# Altium PCB Nano2.PcbDoc
Units mm, origin at the board's own origin, x right, y up, seen from the top; angles counter-clockwise.
Board outline 26 x 54 mm, 4 copper layers (Top Layer, Plane 1, Plane 2, Bottom Layer), stack 1.58 mm thick; 59 components, 34 nets, 219 pads, 123 vias.
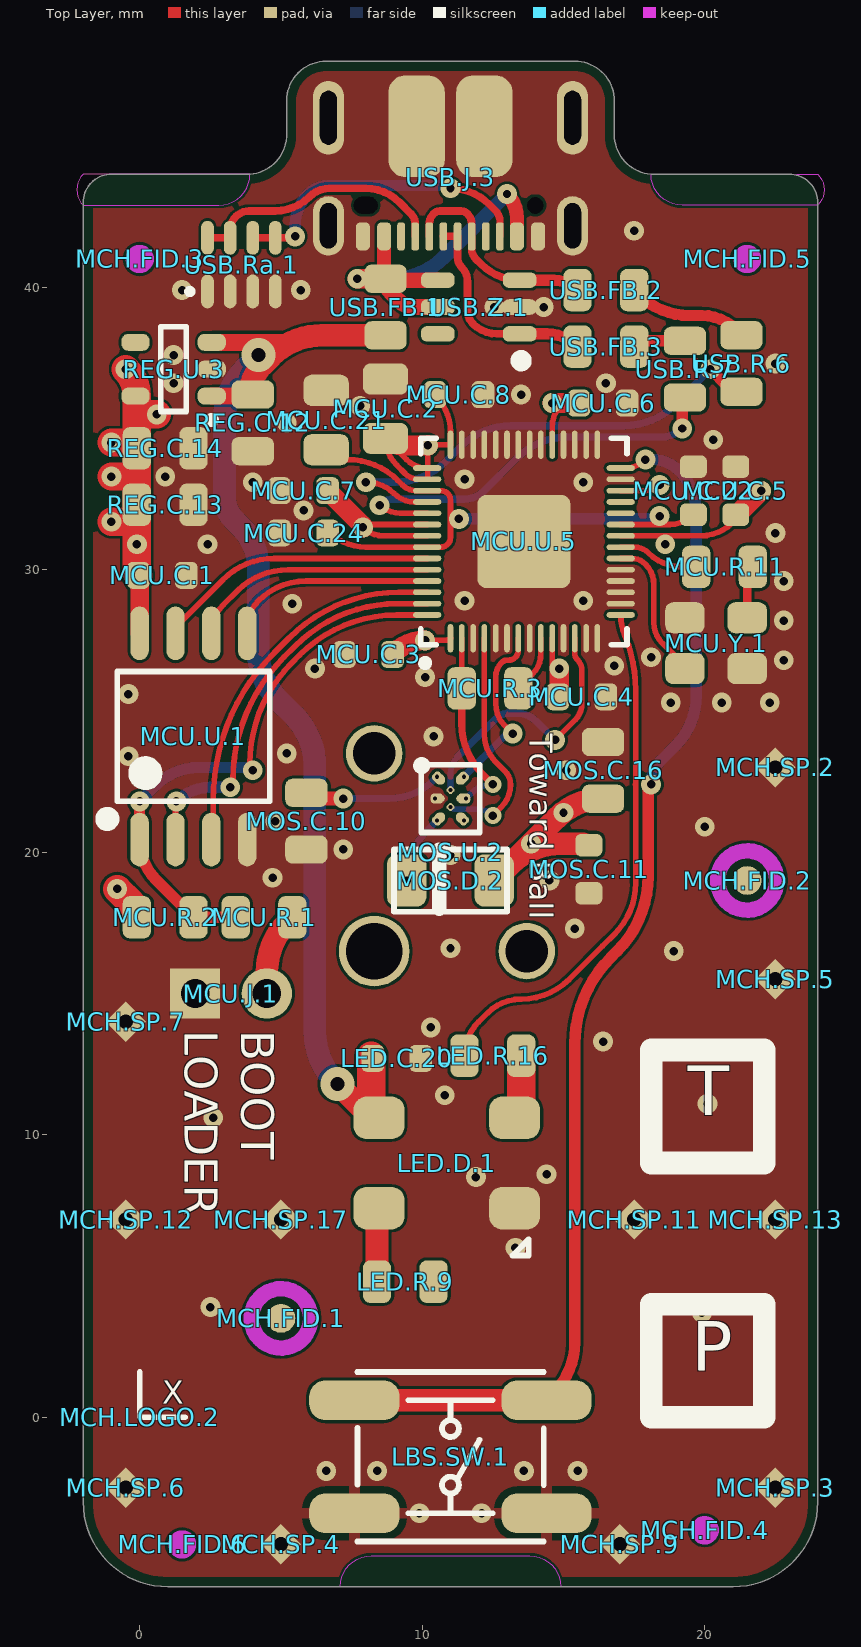
[diagram p0: Top Layer view]
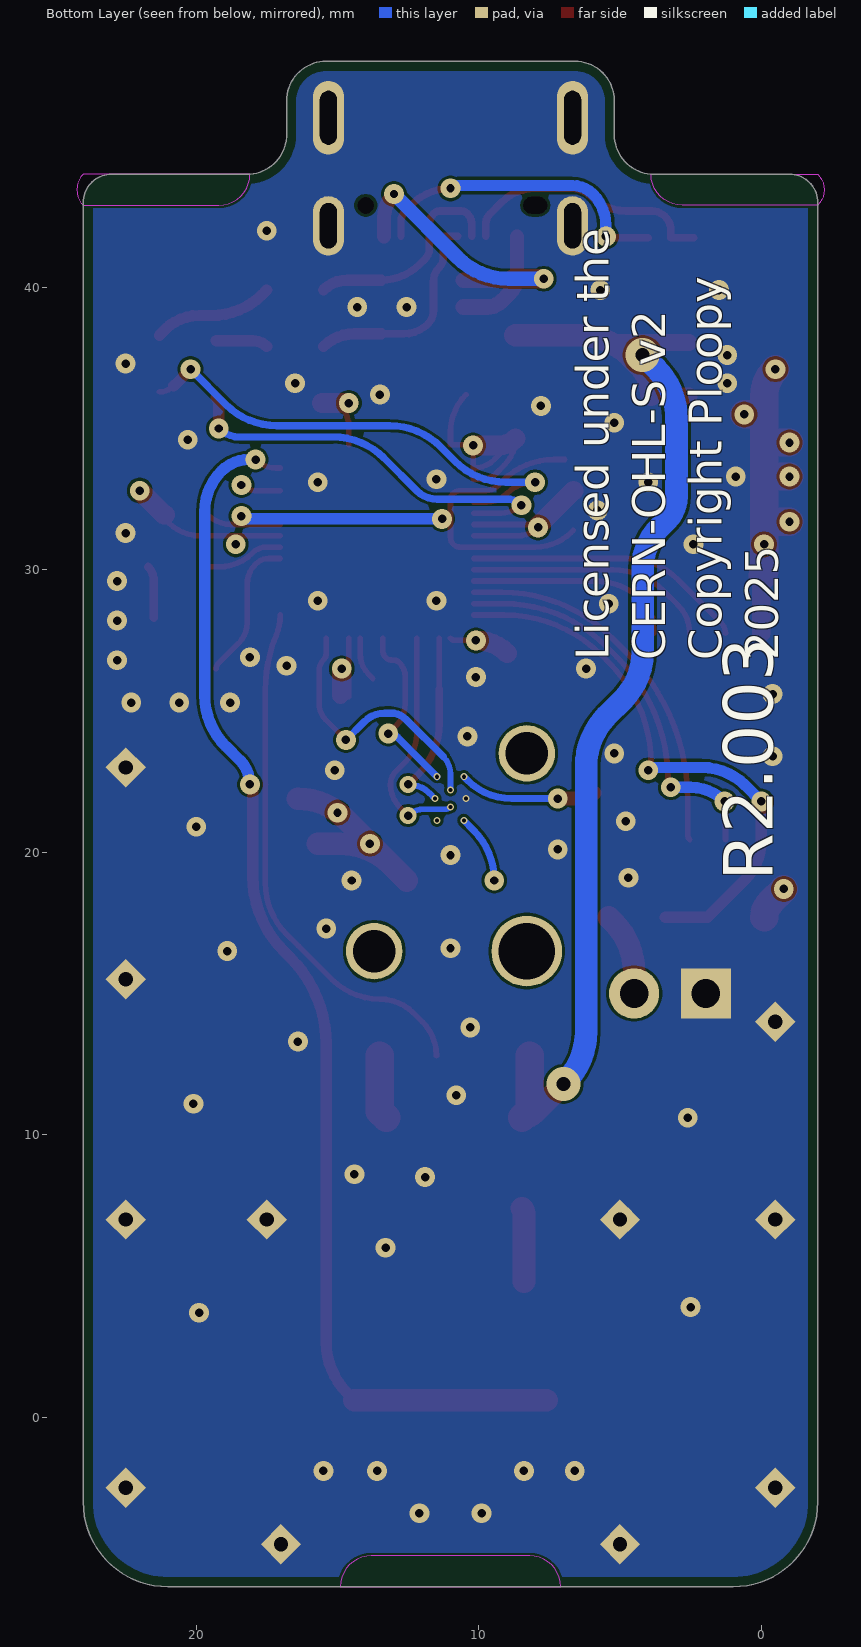
[diagram p1: Bottom Layer view, seen from below]
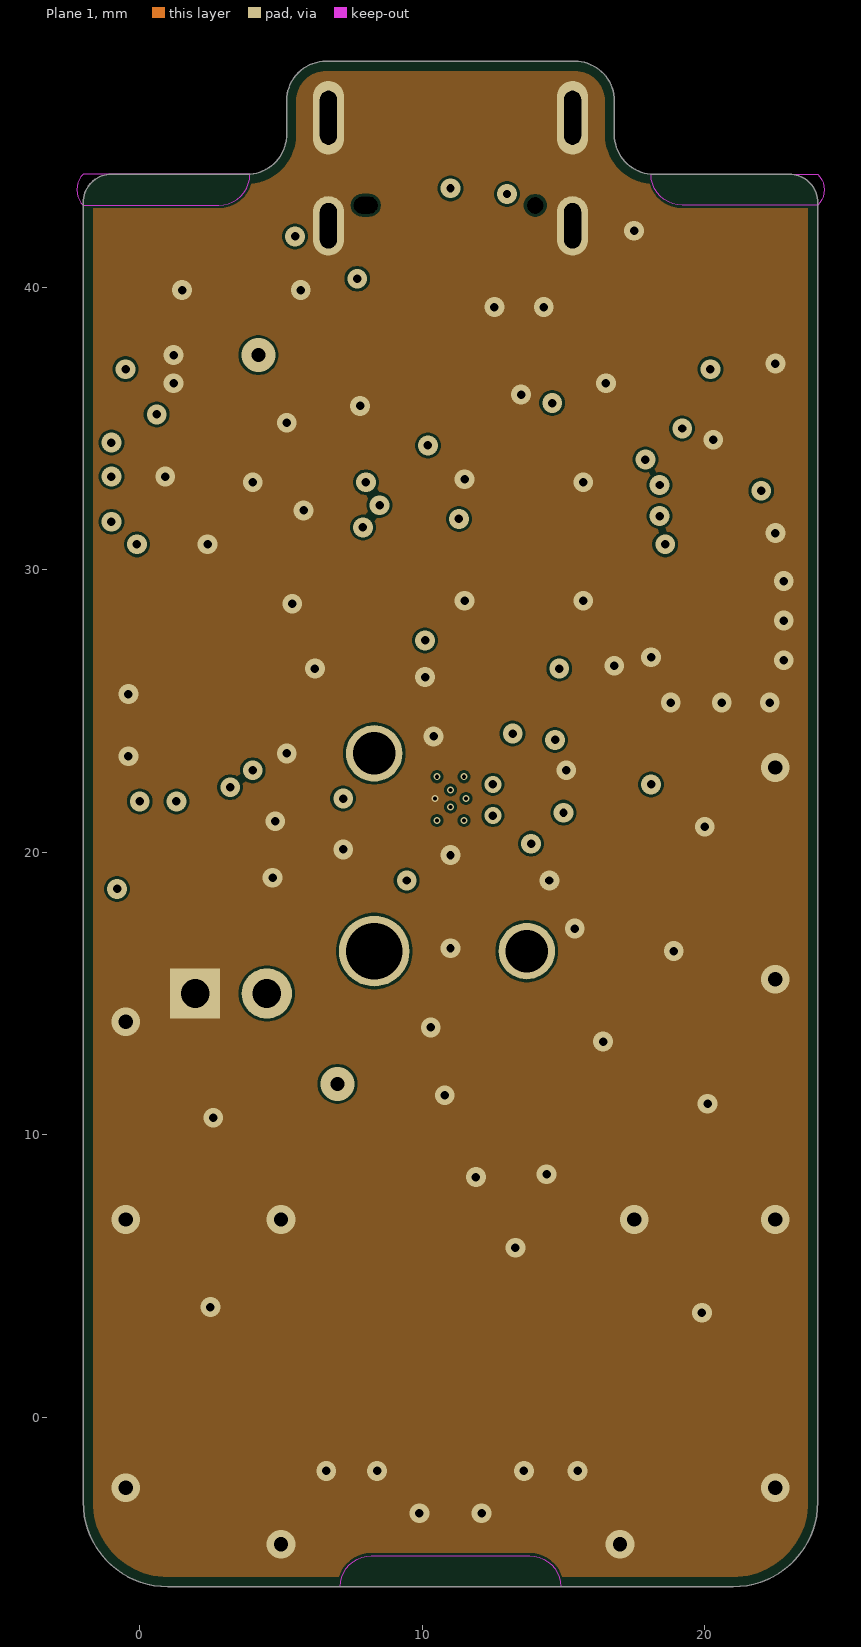
[diagram p2: Plane 1]
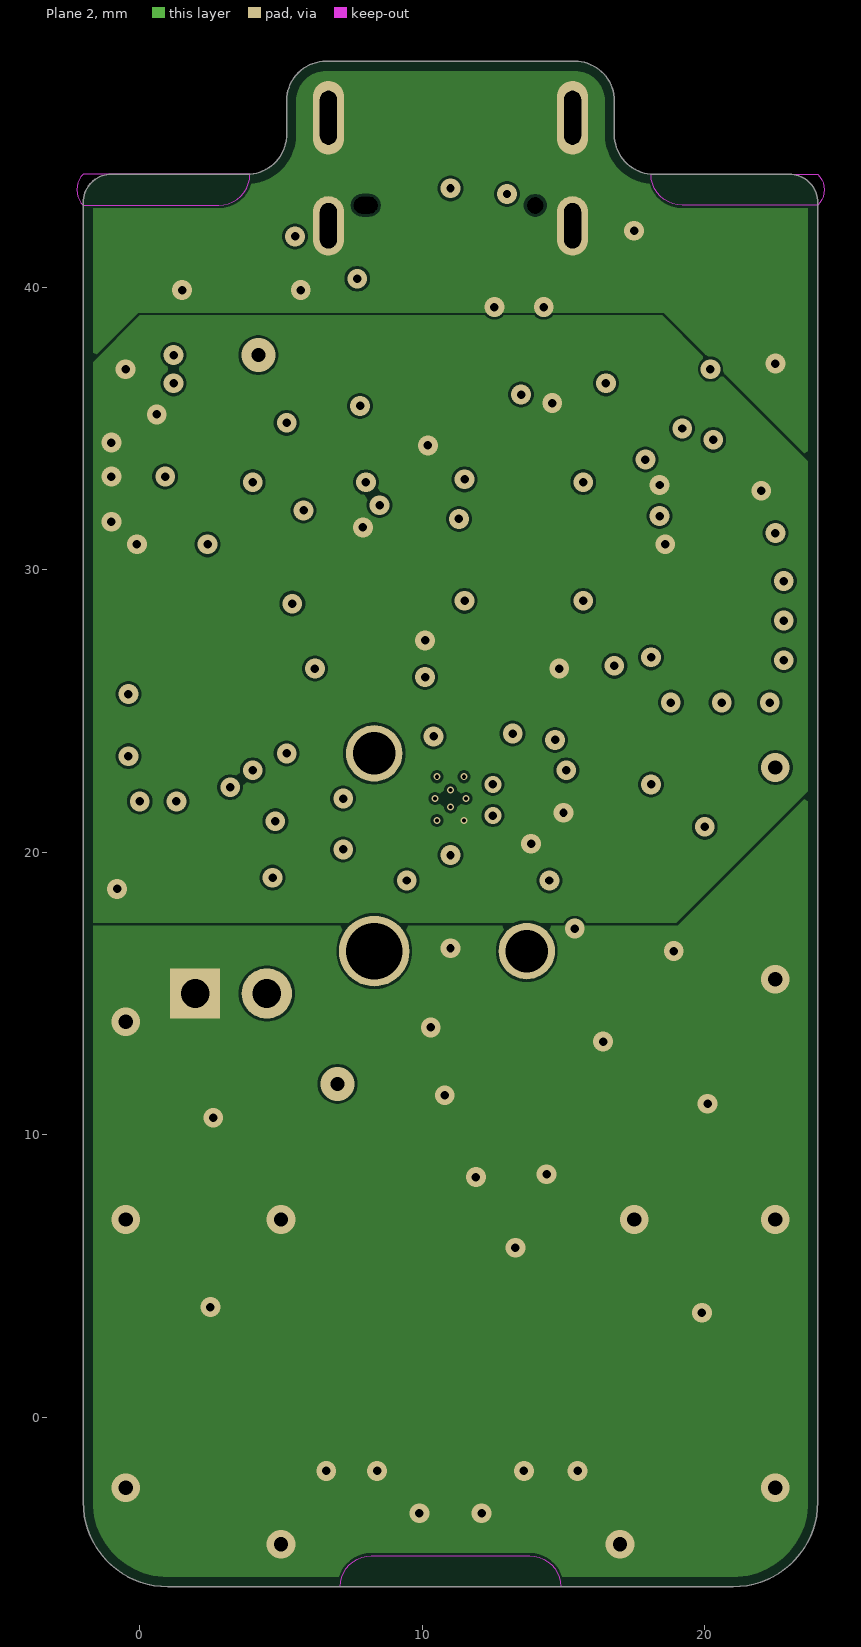
[diagram p3: Plane 2]

## Layer stack, top to bottom
Top Mask: solder mask 0.01, Solder Resist, Dk 3.5
Top Layer: signal copper 0.036
Dielectric 1: prepreg 0.127, FR-4, Dk 4.2
Plane 1: signal copper 0.036
Dielectric 4: core 1.182, Dk 4.2
Plane 2: signal copper 0.036
Dielectric 2: prepreg 0.127, Dk 4.2
Bottom Layer: signal copper 0.036
Bottom Solder: solder mask 0.01, Solder Resist, Dk 3.5

## Board outline
-2,-3 -2,43 cw(c-1,43) -1,44 3.8,44 ccw(c3.8,45.4) 5.2,45.4 5.2,46.6 cw(c6.6,46.6) 6.6,48 15.4,48 cw(c15.4,46.6) 16.8,46.6 16.8,45.4 ccw(c18.2,45.4) 18.2,44 23,44 cw(c23,43) 24,43 24,-3 cw(c21,-3) 21,-6 1,-6 cw(c1,-3)

## Design rules (kind name [scope] priority, off if disabled: settings)
BoardOutlineClearance [(Not HasFootprint('SPARKGAP'))] p1: gap=0.34 ignorepadtopadclearanceinfootprint=FALSE
Clearance Inter-Pad [IsPad vs IsPad] p1: gap=0.1 ignorepadtopadclearanceinfootprint=FALSE
Clearance "Spark Gaps" [InNetClass('Spark Gap') vs InNet('GND') And InPoly] p2: gap=0.6 ignorepadtopadclearanceinfootprint=FALSE
Clearance FIDs [Name like 'FID*'] p3: gap=0.4 ignorepadtopadclearanceinfootprint=FALSE
Clearance "Inner Planes" [InPoly AND OnMid] p4: gap=0.1 ignorepadtopadclearanceinfootprint=FALSE // Defines a larger clearance for planes on inner layers.
Clearance "All Planes" [InPoly] p5: gap=0.1 ignorepadtopadclearanceinfootprint=FALSE // Defines minimum clearance between planes on the same layer.
Clearance "Inner Layer Clearance" [OnMid vs OnMid] p6: gap=0.1 ignorepadtopadclearanceinfootprint=FALSE // We will give inner layers more spacing because they tend to be subject to stricter process limits.
Clearance [All] p7: gap=0.09 ignorepadtopadclearanceinfootprint=FALSE
ComponentClearance "FET/TP self Clearance" [(Name like 'Q*') Or (Name like 'TP*') vs (Name like 'Q*') Or (Name like 'TP*')] p1: gap=0.254 collisioncheckmode=3 verticalgap=0.254 showdistances=FALSE
ComponentClearance [Not ((Name like 'H*') Or (Name like 'FID*') Or (Name like 'SP*')) vs Not ((Name like 'H*') Or (Name like 'FID*') Or (Name like 'SP*'))] p2: gap=0.3 collisioncheckmode=3 verticalgap=0.5 showdistances=FALSE
DiffPairsRouting [All] p1: maxlimit=0.254 minlimit=0.254 mostfreqgap=0.254 toplayer_minwidth=0.381 toplayer_maxwidth=0.381 toplayer_prefwidth=0.381 midlayer2_minwidth=0.381 midlayer2_maxwidth=0.381 midlayer2_prefwidth=0.381 midlayer3_minwidth=0.381 midlayer3_maxwidth=0.381 midlayer3_prefwidth=0.381 bottomlayer_minwidth=0.381 bottomlayer_maxwidth=0.381 bottomlayer_prefwidth=0.381 substack1={D919DD2D-F60F-4B9F-B5AE-F3E69D6E268F} toplayer_{d919dd2d-f60f-4b9f-b5ae-f3e69d6e268f}_minwidth=0.381 toplayer_{d919dd2d-f60f-4b9f-b5ae-f3e69d6e268f}_maxwidth=0.381 toplayer_{d919dd2d-f60f-4b9f-b5ae-f3e69d6e268f}_prefwidth=0.381 midlayer2_{d919dd2d-f60f-4b9f-b5ae-f3e69d6e268f}_minwidth=0.381 midlayer2_{d919dd2d-f60f-4b9f-b5ae-f3e69d6e268f}_maxwidth=0.381 midlayer2_{d919dd2d-f60f-4b9f-b5ae-f3e69d6e268f}_prefwidth=0.381 midlayer3_{d919dd2d-f60f-4b9f-b5ae-f3e69d6e268f}_minwidth=0.381 midlayer3_{d919dd2d-f60f-4b9f-b5ae-f3e69d6e268f}_maxwidth=0.381 midlayer3_{d919dd2d-f60f-4b9f-b5ae-f3e69d6e268f}_prefwidth=0.381 bottomlayer_{d919dd2d-f60f-4b9f-b5ae-f3e69d6e268f}_minwidth=0.381 bottomlayer_{d919dd2d-f60f-4b9f-b5ae-f3e69d6e268f}_maxwidth=0.381 bottomlayer_{d919dd2d-f60f-4b9f-b5ae-f3e69d6e268f}_prefwidth=0.381 maxuncoupledlength=12.7
Height [All] p1: minheight=0 maxheight=13 prefheight=4
HoleSize [All] p1: absolutevalues=TRUE maxlimit=100 minlimit=0.15 maxpercent=80.000 minpercent=20.000
HoleToHoleClearance HoleToHoleClearance_Vias [IsVia vs IsVia] p1: gap=0.2 allowstackedmicrovias=TRUE // Specially small clearance for vias.
HoleToHoleClearance [All] p2: gap=0.45 allowstackedmicrovias=TRUE
LayerPairs [All] p1: enforce=FALSE
MinimumAnnularRing [All] p1: minimumring=0.049
MinimumSolderMaskSliver [All] p1: minsoldermaskwidth=0.1
NetAntennae [Not (HasFootprint('BALANCE_RESISTOR'))] p1: netantennaetolerance=1
PasteMaskExpansion [All] p1: expansion=-0.02
PlaneClearance [All] p1: clearance=0.12
PlaneConnect [All] p1: pad.planeconnectstyle=Relief pad.reliefexpansion=0.5 pad.reliefentries=4 pad.reliefconductorwidth=0.5 pad.reliefairgap=0.25 via.planeconnectstyle=Direct via.reliefexpansion=0.5 via.reliefentries=4 via.reliefconductorwidth=0.5 via.reliefairgap=0.25
PolygonConnect "PolygonConnect Spark Gap" [HasFootprint('SparkGap')] p1: connectstyle=Direct reliefconductorwidth=0.254 reliefentries=4 polygonreliefangle="90 Angle" airgapwidth=0.254 // This rule makes it so spark gaps get direct connections to ground planes.
PolygonConnect PolygonConnect_GND [All vs InNet('GND')] p2: connectstyle=Direct reliefconductorwidth=0.5 reliefentries=4 polygonreliefangle="90 Angle" airgapwidth=0.25 // This rule specifies all vias and holes connected to a GND plane have direct connections.
PolygonConnect [All] p3: connectstyle=Direct reliefconductorwidth=0.5 reliefentries=4 polygonreliefangle="90 Angle" airgapwidth=0.25
RoutingCorners [All] p1: cornerstyle=45-Degree minsetback=1 maxsetback=4
RoutingVias [All] p1: holewidth=0.5 width=1 viastyle="Through Hole" minholewidth=0.15 minwidth=0.25 maxholewidth=6.3 maxwidth=8
ShortCircuit [Not (InPadClass('TraceResistorPads')) vs Not (InPadClass('TraceResistorPads'))] p1: allowed=FALSE
SilkToBoardRegionClearance [All] p1 off:
SilkToSilkClearance [All] p1: silktosilkclearance=0
SilkToSolderMaskClearance SilkscreenOverComponentPads [IsPad] p1: minsilkscreentomaskgap=0.15 clearancetoexposedcopper=FALSE
SolderMaskExpansion SolderMaskExpansion_via [IsVia] p1: expansion=0.102 istentingtop=TRUE
SolderMaskExpansion [All] p2: expansion=0.04 istentingtop=FALSE
Width [All] p1: maxlimit=50.8 minlimit=0.1 preferedwidth=0.4 midlayer2_minwidth=0.12 midlayer3_minwidth=0.12 substack1={D919DD2D-F60F-4B9F-B5AE-F3E69D6E268F} toplayer_{d919dd2d-f60f-4b9f-b5ae-f3e69d6e268f}_minwidth=0.26 midlayer2_{d919dd2d-f60f-4b9f-b5ae-f3e69d6e268f}_minwidth=0.35 midlayer3_{d919dd2d-f60f-4b9f-b5ae-f3e69d6e268f}_minwidth=0.35 bottomlayer_{d919dd2d-f60f-4b9f-b5ae-f3e69d6e268f}_minwidth=0.26 minimp=50.000000 maximp=50.000000 favimp=50.000000
14 further rules are at their usual default settings.

## Classes and differential pairs
component class LED: LED.C.20 LED.D.1 LED.R.9 LED.R.16
component class BTN: LBS.SW.1
component class USB: USB.FB.1 USB.FB.2 USB.FB.3 USB.J.3 USB.R.6 USB.R.7 USB.Ra.1 USB.Z.1
component class REG: REG.C.12 REG.C.13 REG.C.14 REG.U.3
component class MOS: MOS.C.10 MOS.C.11 MOS.C.16 MOS.D.2 MOS.U.2
component class MCU: MCU.C.1 MCU.C.2 MCU.C.3 MCU.C.4 MCU.C.5 MCU.C.6 MCU.C.7 MCU.C.8 MCU.C.21 MCU.C.22 MCU.C.24 MCU.J.1 MCU.R.1 MCU.R.2 MCU.R.3 MCU.R.11 MCU.U.1 MCU.U.5 MCU.Y.1
component class MCH: MCH.FID.1 MCH.FID.2 MCH.FID.3 MCH.FID.4 MCH.FID.5 MCH.FID.6 MCH.LOGO.2 MCH.SP.2 MCH.SP.3 MCH.SP.4 MCH.SP.5 MCH.SP.6 MCH.SP.7 MCH.SP.9 MCH.SP.11 MCH.SP.12 MCH.SP.13 MCH.SP.17

## Components (designator, comment, footprint, x,y, rotation, side; value= is the part's Value field where it differs from the comment)
LBS.SW.1 "EVQ-P0N02B / P0P02B / Q2B02W / Q2D02W" "EVQ-Q2D02W Switch" 11,-1.4 r180 top (schematic designator SW1)
LED.C.20 "0603 X5R" "0603 capacitor - CAPC1608X06N"#1 9.1,12.7 r90 top value="0.1uF 25V" (schematic designator C20)
LED.D.1 "IN-PI55TATPRPGPB" IN-PI55TATPRPGPB 10.87,9 r0 top (schematic designator D1)
LED.R.9 "0805" 0805#1 9.4,4.8 r270 top value="1k 1%" (schematic designator R9)
LED.R.16 "0805" 0805#1 12.5,12.8 r270 top value="1k 1%" (schematic designator R16)
MCH.FID.1 "IPC-7351 Fiducial 1mm" FIDUCIAL_1.5 5,3.5 r90 top (schematic designator FID1)
MCH.FID.2 "IPC-7351 Fiducial 1mm" FIDUCIAL_1.5 21.5,19 r90 top (schematic designator FID2)
MCH.FID.3 "1mm Fiducial for OpenPNP" FIDUCIAL-NEW 0,41 r90 top (schematic designator FID3)
MCH.FID.4 "1mm Fiducial for OpenPNP" FIDUCIAL-NEW 20,-4 r90 top (schematic designator FID4)
MCH.FID.5 "1mm Fiducial for OpenPNP" FIDUCIAL-NEW 21.5,41 r90 top (schematic designator FID5)
MCH.FID.6 "1mm Fiducial for OpenPNP" FIDUCIAL-NEW 1.5,-4.5 r90 top (schematic designator FID6)
MCH.LOGO.2 "Coordinate system marker for assembly" "Coordinate System" 0,0 r0 top (schematic designator LOGO2)
MCH.SP.2 "Spark Gap" SparkGap 22.5,23 r90 top (schematic designator SP2)
MCH.SP.3 "Spark Gap" SparkGap 22.5,-2.5 r90 top (schematic designator SP3)
MCH.SP.4 "Spark Gap" SparkGap 5,-4.5 r90 top (schematic designator SP4)
MCH.SP.5 "Spark Gap" SparkGap 22.5,15.5 r90 top (schematic designator SP5)
MCH.SP.6 "Spark Gap" SparkGap -0.5,-2.5 r90 top (schematic designator SP6)
MCH.SP.7 "Spark Gap" SparkGap -0.5,14 r90 top (schematic designator SP7)
MCH.SP.9 "Spark Gap" SparkGap 17,-4.5 r90 top (schematic designator SP9)
MCH.SP.11 "Spark Gap" SparkGap 17.5,7 r90 top (schematic designator SP11)
MCH.SP.12 "Spark Gap" SparkGap -0.5,7 r90 top (schematic designator SP12)
MCH.SP.13 "Spark Gap" SparkGap 22.5,7 r90 top (schematic designator SP13)
MCH.SP.17 "Spark Gap" SparkGap 5,7 r90 top (schematic designator SP17)
MCU.C.1 "0603 X5R" "0603 capacitor - CAPC1608X06N"#2 0.8,29.8 r90 top value="0.1uF 25V" (schematic designator C1)
MCU.C.2 "0805 X5R" "0805 - TALL" 8.7,35.7 r0 top value="1uF 25V" (schematic designator C2)
MCU.C.3 "0603 X5R" "0603 capacitor - CAPC1608X06N"#2 8.1,27 r270 top value="0.1uF 25V" (schematic designator C3)
MCU.C.4 "0603 X5R" "0603 capacitor - CAPC1608X06N"#2 15.65,25.5 r90 top value="0.1uF 25V" (schematic designator C4)
MCU.C.5 "0603 X5R" "0603 capacitor - CAPC1608X06N"#2 21.1,32.8 r180 top value="0.1uF 25V" (schematic designator C5)
MCU.C.6 "0603 X5R" "0603 capacitor - CAPC1608X06N"#2 16.4,35.9 r90 top value="0.1uF 25V" (schematic designator C6)
MCU.C.7 "0603 X5R" "0603 capacitor - CAPC1608X06N"#2 5.8,32.8 r270 top value="0.1uF 25V" (schematic designator C7)
MCU.C.8 "0603 X5R" "0603 capacitor - CAPC1608X06N"#2 11.3,36.2 r90 top value="0.1uF 25V" (schematic designator C8)
MCU.C.21 "0805 X5R" "0805 - TALL" 6.6,35.3 r0 top value="1uF 25V" (schematic designator C21)
MCU.C.22 "0603 X5R" "0603 capacitor - CAPC1608X06N"#2 19.6,32.8 r180 top value="0.1uF 25V" (schematic designator C22)
MCU.C.24 "0603 X5R" "0603 capacitor - CAPC1608X06N"#2 5.8,31.3 r270 top value="0.1uF 25V" (schematic designator C24)
MCU.J.1 "HEADER2" 2x1 1.96,15 r90 top (schematic designator J1)
MCU.R.1 "0805" 0805#2 4.4,17.7 r270 top value="1k 1%" (schematic designator R1)
MCU.R.2 "0805" 0805#2 0.9,17.7 r90 top value="10k 1%" (schematic designator R2)
MCU.R.3 "0805" 0805#2 12.4,25.8 r270 top value="1k 1%" (schematic designator R3)
MCU.R.11 "0805" 0805#2 20.7,30.1 r90 top value="1k 1%" (schematic designator R11)
MCU.U.1 "W25Q16JVSSIQ" "W25Q128JVS - SOIC127P790X216-8M" 1.9,24.1 r90 top (schematic designator U1)
MCU.U.5 "RP2040" "RP2040 - QFN40P700X700X90_HS-57M" 13.6,31 r90 top (schematic designator U5)
MCU.Y.1 "RH100-12.000-16-3030" RH100-12.000-16-3030 20.4,27.4 r0 top (schematic designator Y1)
MOS.C.10 "0805" 0805#2 5.9,21.1 r180 top value="10uF 25V" (schematic designator C10)
MOS.C.11 "0603 X5R" "0603 capacitor - CAPC1608X06N"#2 15.9,19.4 r0 top value="0.1uF 25V" (schematic designator C11)
MOS.C.16 "0805" 0805#2 16.4,22.9 r0 top value="10uF 25V" (schematic designator C16)
MOS.D.2 "SFH 4052" "Osram SFH 4052 - DIOC3216X12M" 11,19 r0 top (schematic designator D2)
MOS.U.2 "PAW3222LU-TJDU" "PAW3222LU-TJDU - BGA15C30P3X5_155X189X72" 11,21.9 r0 top locked (schematic designator U2)
REG.C.12 "0805" 0805#2 4,35.2 r180 top value="1uF 25V" (schematic designator C12)
REG.C.13 "0805" 0805#2 0.9,32.3 r270 top value="10uF 25V" (schematic designator C13)
REG.C.14 "0805" 0805#2 0.9,34.3 r270 top value="1uF 25V" (schematic designator C14)
REG.U.3 "AP2202K-3.3" "AP2202 - SOT95P270X145-5N" 1.2,37.1 r180 top (schematic designator U3)
USB.FB.1 "ACML-0805-601-T" 0805#2 8.7,39.3 r0 top (schematic designator FB1)
USB.FB.2 "ACML-0805-601-T" 0805#2 16.5,39.9 r90 top (schematic designator FB2)
USB.FB.3 "ACML-0805-601-T" 0805#2 16.5,37.9 r90 top (schematic designator FB3)
USB.J.3 "DX07S016JA1R1500" DX07S016JA1R1500 11,44.8 r180 top (schematic designator J3)
USB.R.6 "0805" 0805#2 21.3,37.3 r0 top value="22R 1%" (schematic designator R6)
USB.R.7 "0805" 0805#2 19.3,37.1 r0 top value="22R 1%" (schematic designator R7)
USB.Ra.1 "1206 Quad" "4x 10k 1% - CAC-80P320X160-8M" 3.6,40.8 r90 top value="10k 1%" (schematic designator Ra1)
USB.Z.1 "IP4220CZ6,125" "PESD3V3S4UD - SOT95P275X110-6N" 12,39.3 r180 top (schematic designator Z1)

## Footprints (in the part's own frame and the unit in brackets; to place one, negate y for a bottom-side part, rotate by r counter-clockwise, add the part's x,y. Pads: shape width x height; smd on the part's side, far side on the other; paste and mask are expansions set on the pad)
2x1 [mil]
  rect 70x70 hole 40 paste-3897.64: 1(0,0)
  round 70 hole 40 paste-3897.64: 2(0,-100)
"4x 10k 1% - CAC-80P320X160-8M" [mm] "Chip Array, Concave, 8-Leads, Pitch 0.80mm,  Body 3.20x1.60mm,  IPC Low Density"
  oval 1.2x0.45 smd paste-99: 1(-0.95,1.2) 2(-0.95,0.4) 3(-0.95,-0.4) 4(-0.95,-1.2) 5(0.95,-1.2) 6(0.95,-0.4) 7(0.95,0.4) 8(0.95,1.2)
  silkscreen extent -1,1.78 -0.9,1.87, body extent -0.9,-1.7 0.9,1.7, height 0.6
"0603 capacitor - CAPC1608X06N"#1 [mm] "Chip Capacitor, 2-Leads, Body 1.60x0.80mm, IPC Medium Density"
  rrect50% 0.95x0.8 smd paste-99: 1(0,-0.85) 2(0,0.85)
  body extent -0.45,-0.85 0.45,0.85, height 0.6
"0603 capacitor - CAPC1608X06N"#2 [mm] "Chip Capacitor, 2-Leads, Body 1.60x0.80mm, IPC Medium Density"
  rrect50% 0.95x0.8 smd: 1(0,-0.85) 2(0,0.85)
  body extent -0.45,-0.85 0.45,0.85, height 0.6
0805#1 [mm] "Chip Capacitor, 2-Leads, Body 2.0x1.3mm, IPC Medium Density"
  rrect50% 1.5x1 smd paste-99: 1(0,1.002) 2(0,-1.002)
  body extent -0.72,-1.1 0.72,1.1, height 0.8
0805#2 [mm] "Chip Capacitor, 2-Leads, Body 2.0x1.3mm, IPC Medium Density"
  rrect50% 1.5x1 smd paste+0: 1(0,1.002) 2(0,-1.002)
  body extent -0.72,-1.1 0.72,1.1, height 0.8
"0805 - TALL" [mm] "Same as 0805 footprint, but solder mask is adjusted to leave more paste behind for tall (>0.9mm) components like big caps, which tend to be solder-starved on the regular footprint."
  rrect50% 1.6x1.1 smd paste+0: 1(0,1.052) 2(0,-1.052)
  body extent -0.72,-1.1 0.72,1.1, height 0.8
"AP2202 - SOT95P270X145-5N" [mm] "SOT23, 5-Leads, Body 2.92x2.70mm, Pitch 0.95mm, IPC Medium Density"
  rrect80% 1x0.6 smd paste-0.04: 1(-1.35,0.95) 2(-1.35,0) 3(-1.35,-0.95) 4(1.35,-0.95) 5(1.35,0.95)
  silkscreen extent -1.48,-1.5 0.45,1.92, body extent -0.85,-1.52 0.85,1.52, height 1.45
"Coordinate System" [mm]
  silkscreen extent 0,0 1.6,1.6
DX07S016JA1R1500 [mm] "USB-C (USB TYPE-C) USB 2.0 Receptacle Connector 24 (16+8 Dummy) Position Surface Mount, Right Angle; Through Hole"
  rrect70% 0.5x1 smd paste-0.04 mask+0.05: 1(-3.1,3) 2(-2.35,3) 11(2.35,3) 12(3.1,3)
  rrect70% 0.27x1 smd paste-0.02 mask+0.05: 3(-1.75,3) 4(-1.25,3) 5(-0.75,3) 6(-0.25,3) 7(0.25,3) 8(0.75,3) 9(1.25,3) 10(1.75,3)
  rrect100% 1.1x2.6 hole 0.6 slot 1.9 at 90 deg paste-99 mask+0.1: SHELL(-4.32,-1.2) SHELL(4.32,-1.2)
  rrect100% 1.1x2.1 hole 0.6 slot 1.6 at 90 deg paste-99 mask+0.1: SHELL(-4.32,2.625) SHELL(4.32,2.625)
  rrect60% 2x3.6 smd paste-0.12 mask+0.05: SHELL(-1.2,-0.9) SHELL(1.2,-0.9)
  round 0 hole 0.6: ""(-3,1.9)
  round 0 hole 0.6 slot 0.85 at 0 deg: ""(3,1.9)
  body extent -4.47,-3.65 4.47,3.25, height 3.18
"EVQ-Q2D02W Switch" [mm] "Alternately: EVQP0N02B, EVQP0P02B, EVQQ2B02W"
  rrect80% 3.2x1.4 smd paste-0.08: A(-3.4,-2) A(3.4,-2) B(-3.4,2) B(3.4,2)
  silkscreen extent -3.3,-3 3.3,3, body extent -3.3,-3 3.3,3, height 2.5
FIDUCIAL-NEW [mm]
  Top Layer keep-out circle w0.6: c0,0 r0.2
FIDUCIAL_1.5 [mil]
  round 40 smd paste-60 mask+30: 1(0,0)
  Top Layer keep-out circle w21.65: c0,0 r41.34
IN-PI55TATPRPGPB [mm]
  rrect60% 1.8x1.5 smd paste-99 mask+0.06: 1(-2.4,1.6) 2(-2.4,-1.6) 3(2.4,-1.6) 4(2.4,1.6)
  silkscreen extent 2.32,-3.27 2.9,-2.7, body extent -2.5,-2.5 2.5,2.5, height 1.6
"Osram SFH 4052 - DIOC3216X12M" [mm] "Chip Diode, 2-Leads, Body 3.20x1.60mm, IPC Low Density"
  rrect50% 1.4x1.85 smd paste-0.05 mask+0.1: A(1.55,0) C(-1.55,0)
  silkscreen extent -0.4,-1 -0.4,1.1, body extent -1.65,-0.85 1.65,0.85, height 1.2
"PAW3222LU-TJDU - BGA15C30P3X5_155X189X72" [mm] "BGA, 15-Leads, Body 1.55x1.89mmx0.73mm, Pitch 0.30mm"
  rrect70% 0.44x0.36 smd rot 135 paste-0.04 mask+0.04: A1(-0.43,0.73) E3(0.43,-0.73)
  rrect70% 0.32x0.32 smd paste-0.04 mask+0.04: A1(-0.359,0.659) A3(0.357,0.658) E1(-0.359,-0.659) E3(0.359,-0.659)
  rrect70% 0.44x0.36 smd rot 45 paste-0.04 mask+0.04: A3(0.428,0.728) E1(-0.43,-0.73)
  rrect60% 0.25x0.25 smd rot 45 paste-0.01 mask+0.04: B2(0,0.3) D2(0,-0.3)
  rrect70% 0.44x0.36 smd paste-0.04 mask+0.04: C1(-0.48,0) C3(0.48,0)
  rrect70% 0.32x0.32 smd rot 45 paste-0.04 mask+0.04: C1(-0.38,0) C3(0.38,0)
  round 2.5 hole 2: ""(-2.7,-5.4)
  round 2 hole 1.5: ""(-2.7,1.6) ""(2.7,-5.4)
  silkscreen extent -2,-4 2,1.26
"PESD3V3S4UD - SOT95P275X110-6N" [mm] "SOT23, 6-Leads, Body 2.90x2.75mm, Pitch 0.95mm, IPC Medium Density"
  rrect80% 1.2x0.55 smd paste-0.03 mask+0.085: 1(-1.45,0.95) 2(-1.45,0) 3(-1.45,-0.95) 4(1.45,-0.95) 5(1.45,0) 6(1.45,0.95)
  silkscreen extent -1.63,1.78 -1.38,2.02, body extent -0.85,-1.55 0.85,1.55, height 1.1
RH100-12.000-16-3030 [mm] "3.2mm x 2.5mm crystal"
  rrect50% 1.4x1.1 smd paste-0.1: 1(-1.1,-0.9) 2(1.1,-0.9) 3(1.1,0.9) 4(-1.1,0.9)
  body extent -1.6,-1.25 1.6,1.25, height 1
"RP2040 - QFN40P700X700X90_HS-57M" [mm] "QFN, 56-Leads, Body 7.00x7.00mm, Pitch 0.40mm, Thermal Pad 3.10x3.10mm, IPC Low Density"
  oval 1x0.2 smd paste-99 mask+0.05: 1(-3.425,2.6) 2(-3.425,2.2) 3(-3.425,1.8) 4(-3.425,1.4) 5(-3.425,1) 6(-3.425,0.6) 7(-3.425,0.2) 8(-3.425,-0.2) 9(-3.425,-0.6) 10(-3.425,-1) 11(-3.425,-1.4) 12(-3.425,-1.8) 13(-3.425,-2.2) 14(-3.425,-2.6) 29(3.425,-2.6) 30(3.425,-2.2) 31(3.425,-1.8) 32(3.425,-1.4) 33(3.425,-1) 34(3.425,-0.6) 35(3.425,-0.2) 36(3.425,0.2) 37(3.425,0.6) 38(3.425,1) 39(3.425,1.4) 40(3.425,1.8) 41(3.425,2.2) 42(3.425,2.6)
  oval 0.2x1 smd paste-99 mask+0.05: 15(-2.6,-3.425) 16(-2.2,-3.425) 17(-1.8,-3.425) 18(-1.4,-3.425) 19(-1,-3.425) 20(-0.6,-3.425) 21(-0.2,-3.425) 22(0.2,-3.425) 23(0.6,-3.425) 24(1,-3.425) 25(1.4,-3.425) 26(1.8,-3.425) 27(2.2,-3.425) 28(2.6,-3.425) 43(2.6,3.425) 44(2.2,3.425) 45(1.8,3.425) 46(1.4,3.425) 47(1,3.425) 48(0.6,3.425) 49(0.2,3.425) 50(-0.2,3.425) 51(-0.6,3.425) 52(-1,3.425) 53(-1.4,3.425) 54(-1.8,3.425) 55(-2.2,3.425) 56(-2.6,3.425)
  rrect20% 3.3x3.3 smd paste-99: 57(0,0)
  silkscreen extent -4.42,-3.65 3.65,3.65, body extent -3.5,-3.5 3.5,3.5, height 0.9
SparkGap [mil]
  rect 40x40 smd rot 45 paste-99 mask+4: 1(0,0)
  rect 40x40 smd far side rot 45 paste-99 mask+4: 1(0,0)
"W25Q128JVS - SOIC127P790X216-8M" [mm] "SOIC, 8-Leads, Body 5.28x5.28mm, Pitch 1.27mm, IPC Low Density"
  oval 1.9x0.65 smd paste-0.05: 1(-3.65,1.905) 2(-3.65,0.635) 3(-3.65,-0.635) 4(-3.65,-1.905) 5(3.65,-1.905) 6(3.65,-0.635) 7(3.65,0.635) 8(3.65,1.905)
  silkscreen extent -3.05,-2.7 2.3,3.17, body extent -2.7,-2.7 2.7,2.7, height 2.16

## Part data
LBS.SW.1: library part EVQ-Q2D02W, "Tactile Switch SPST-NO Top Actuated Surface Mount"
LED.C.20 MCU.C.1 MCU.C.3 MCU.C.4 MCU.C.5 MCU.C.6 MCU.C.7 MCU.C.8 MCU.C.22 MCU.C.24 MOS.C.11: library part "Cap 0.1uF 25V", "0603, X5R or better", Supplier Part Number 1=1276-6840-2-ND, Supplier 1=Digi-Key
LED.D.1: "ADDRESS LED DISCRETE SERIAL RGB", Supplier Part Number 1=1830-1204-1-ND, Supplier 1=Digi-Key, Supplier 2=Arrow, Supplier 3=Mouser, Supplier Part Number 2=IN-PI55TATPRPGPB, Supplier Part Number 3=743-IN-PI55TATPRPGPB
LED.R.9 LED.R.16 MCU.R.1 MCU.R.3 MCU.R.11: library part "Res 1k 1% 0805", "Chip resistor, 1/8W 100PPM", Supplier Part Number 1=RMCF0805FT1K00TR-ND, Supplier 1=Digi-Key
MCH.FID.1 MCH.FID.2: library part FIDUCIAL_1.5, PNP-A=1, PNP-da=0, PNP-dx=0, PNP-dy=0, PNP-FeedType=Fiducial, PNP-Level=1, PNP-Lv=1, PNP-Nzl=2, PNP-PlacePriority=0, PNP-Pt=0, PNP-TapeIndex=0, PNP-TapeWidth=0, PNP-Thk=1.02, PNP-TS=70, PNP-Type=MARK1, PNP-Voff=0, PNP-W=0, PNP-X=4, PNP-Y=4
MCH.FID.3 MCH.FID.4 MCH.FID.5 MCH.FID.6: library part FIDUCIAL_NEW, "This fiducial is designed to work with OpenPNP. It presents a circular pattern under the solder mask, to prevent glare issues from messing with the detection.", PNP-A=1, PNP-da=0, PNP-dx=0, PNP-dy=0, PNP-FeedType=Fiducial, PNP-Level=1, PNP-Lv=1, PNP-Nzl=2, PNP-PlacePriority=0, PNP-Pt=0, PNP-TapeIndex=0, PNP-TapeWidth=0, PNP-Thk=1.02, PNP-TS=70, PNP-Type=MARK1, PNP-Voff=0, PNP-W=0, PNP-X=4, PNP-Y=4
MCH.LOGO.2: library part CoordinateSystem
MCH.SP.2 MCH.SP.3 MCH.SP.4 MCH.SP.5 MCH.SP.6 MCH.SP.7 MCH.SP.9 MCH.SP.11 MCH.SP.12 MCH.SP.13 MCH.SP.17: "Open square pad for spark gapping", PNP-A=0, PNP-da=0, PNP-dx=0, PNP-dy=0, PNP-FeedType=Tape, PNP-Level=1, PNP-Lv=1, PNP-Nzl=2, PNP-PlacePriority=1, PNP-Pt=0, PNP-TapeIndex=1, PNP-TapeWidth=8, PNP-Thk=1, PNP-TS=70, PNP-Type=CHI, PNP-Voff=0, PNP-W=0, PNP-X=1, PNP-Y=1
MCU.C.2 MCU.C.21 REG.C.12 REG.C.14: library part "Cap 1uF 25V", "0805, X5R or better", Supplier Part Number 1=1276-1066-2-ND, Supplier 1=Digi-Key, Supplier 2=Digi-Key, Supplier Part Number 2=1276-1066-1-ND
  REG.C.12 REG.C.14: PNP-A=0, PNP-da=0, PNP-dx=0, PNP-dy=0, PNP-FeedType=Tape, PNP-Level=1, PNP-Lv=1, PNP-Nzl=2, PNP-PlacePriority=1, PNP-Pt=0, PNP-TapeIndex=1, PNP-TapeWidth=8, PNP-Thk=1.25, PNP-TS=70, PNP-Type=chi, PNP-Voff=0, PNP-W=0, PNP-X=2.00, PNP-Y=1.25
MCU.J.1: "2-pin 0.100\" header", Supplier Part Number 1=855-M20-9990245, Supplier 1=Mouser, Supplier 2=Digi-Key, Supplier Part Number 2=952-2261-ND
MCU.R.2: library part "Res 10k 1% 0805", "Chip resistor", Supplier Part Number 1=RMCF0805FT10K0TR-ND, Supplier 1=Digi-Key
MCU.U.1: Supplier Part Number 1=W25Q16JVSSIQ-ND, Supplier 1=Digi-Key
MCU.U.5: Supplier Part Number 1=49AJ8740, Supplier 1=Newark
MCU.Y.1: "12MHz Crystal 16pF 100 Ohms 4-SMD, No Lead (3.2mm x 2.5mm)", Supplier Part Number 1=XC2686CT-ND, Supplier 1=Digi-Key, Supplier 2=Mouser, Supplier Part Number 2=520-160-12-30B-AGMT
MOS.C.10 MOS.C.16 REG.C.13: library part "Cap 10uF 25V", "0805, X5R or better", Supplier Part Number 1=81-GRM21BR61E106KA3L, PNP-A=0, PNP-da=0, PNP-dx=0, PNP-dy=0, PNP-FeedType=Tape, PNP-Level=1, PNP-Lv=1, PNP-Nzl=2, PNP-PlacePriority=1, PNP-Pt=0, PNP-TapeIndex=1, PNP-TapeWidth=8, PNP-Thk=1.25, PNP-TS=70, PNP-Type=chi, PNP-Voff=0, PNP-W=0, PNP-X=2.00, PNP-Y=1.25, Supplier 1=Mouser, Supplier 2=Digi-Key, Supplier Part Number 2=490-5523-1-ND
MOS.D.2: "Infrared (IR) Emitter 850nm 1206"
MOS.U.2: "Ultra Low Power Wireless Mouse Chip"
REG.U.3: "3.3V 150mA LDO regulator", Supplier Part Number 1=621-AP2202K-3.3TRG1, PNP-A=90, PNP-da=0, PNP-dx=0, PNP-dy=0, PNP-FeedType=Tape, PNP-Level=1, PNP-Lv=26, PNP-Nzl=2, PNP-PlacePriority=3, PNP-Pt=0, PNP-TapeIndex=1, PNP-TapeWidth=8, PNP-Thk=1, PNP-TS=90, PNP-Type=CHP, PNP-Voff=0, PNP-W=0, PNP-X=2.9, PNP-Y=1.3, Supplier 1=Mouser, Supplier 2=Digi-Key, Supplier 3=Arrow, Supplier Part Number 2=AP2202K-3.3TRG1DICT-ND, Supplier Part Number 3=PWagzdsTFFHKE_U17B45SP-NtndBrheJIaI5hB7gHD0ZVywxIBNyoAQstvnyfZZ0
USB.FB.1 USB.FB.2 USB.FB.3: "FERRITE BEAD 600 OHM 0805 1LN", Supplier Part Number 1=535-12556-1-ND, PNP-A=0, PNP-da=0, PNP-dx=0, PNP-dy=0, PNP-FeedType=Tape, PNP-Level=1, PNP-Lv=1, PNP-Nzl=2, PNP-PlacePriority=1, PNP-Pt=0, PNP-TapeIndex=1, PNP-TapeWidth=8, PNP-Thk=0.55, PNP-TS=70, PNP-Type=chi, PNP-Voff=0, PNP-W=0, PNP-X=2.00, PNP-Y=1.25, Supplier 1=Digi-Key
USB.J.3: "USB-C (USB TYPE-C) USB 2.0 Receptacle Connector 24 (16+8 Dummy) Position Surface Mount, Right Angle; Through Hole", Supplier Part Number 1=670-DX07S016JA1R1500CT-ND, Supplier 1=Digi-Key, Supplier 2=Mouser, Supplier Part Number 2=656-DX07S016JA1R1500
USB.R.6 USB.R.7: library part "Res 22R 1% 0805", "Chip resistor", Supplier Part Number 1=RMCF0805FT22R0CT-ND, PNP-A=0, PNP-da=0, PNP-dx=0, PNP-dy=0, PNP-FeedType=Tape, PNP-Level=1, PNP-Lv=1, PNP-Nzl=2, PNP-PlacePriority=1, PNP-Pt=0, PNP-TapeIndex=1, PNP-TapeWidth=8, PNP-Thk=0.55, PNP-TS=70, PNP-Type=chi, PNP-Voff=0, PNP-W=0, PNP-X=2.00, PNP-Y=1.25, Supplier 1=Digi-Key, Supplier 2=Arrow, Supplier Part Number 2=RMCF0805FT22R0
USB.Ra.1: library part "Quad Res 10k 1% 1206", "Chip resistor"
USB.Z.1: "TVS DIODE 5.5V 6TSOP (Low capacitance, USB)", PNP-A=270, PNP-da=0, PNP-dx=0, PNP-dy=0, PNP-FeedType=Tape, PNP-Level=1, PNP-Lv=26, PNP-Nzl=2, PNP-PlacePriority=3, PNP-Pt=0, PNP-TapeIndex=1, PNP-TapeWidth=8, PNP-Thk=1, PNP-TS=90, PNP-Type=CHP, PNP-Voff=0, PNP-W=0, PNP-X=2.9, PNP-Y=1.3

## Via types
v1: diameter 0.7, hole 0.3, Top Layer to Bottom Layer, tented both sides, 98 vias
v2: diameter 1.016, hole 0.508, Top Layer to Bottom Layer, tented both sides, 11 vias
v3: diameter 0.25, hole 0.15, Top Layer to Bottom Layer, tented both sides, 8 vias
v4: diameter 0.7, hole 0.3, Top Layer to Bottom Layer, tented bottom, 2 vias
v5: diameter 1.2, hole 0.5, Top Layer to Bottom Layer, tented both sides, 2 vias
v6: diameter 0.6, hole 0.3, Top Layer to Bottom Layer, tented both sides, 1 vias
v7: diameter 0.6, hole 0.3, Top Layer to Bottom Layer, tented bottom, 1 vias

## Nets (pads, with @x,y where several pads share a name; then routed paths per layer and width w, separated by ;. In a path a pad name is that pad's centre, name@x,y a point inside that pad or via, vN(x,y) a via of type N, cw(c..) or ccw(c..) an arc to the next point about the centre after c; other vN are vias at no path point)
1V1: MCU.C.21.2 MCU.C.22.2 MCU.C.24.2 MCU.U.5.23 MCU.U.5.45 MCU.U.5.50 | length 20.4
  Top Layer w0.2: MCU.C.24.2@6.65,31.4 6.72,31.33 ccw(c8,32.611) 8,30.8 MCU.U.5.50 10.659,30.8 ccw(c10.659,31.141) 10.9,30.9 ccw(c10.659,31.141) 11,31.141 11,32.459 ccw(c10.659,32.459) 10.9,32.7 ccw(c10.659,32.459) 10.659,32.8 MCU.U.5.45 MCU.U.5.45@9.775,32.8 ; MCU.C.21.2@6.952,33.9 7.348,33.9 cw(c7.348,31.36) 9.144,33.156 9.3,33 ccw(c9.783,33.483) MCU.U.5.45@9.749,32.801 ; MCU.U.5.23 18.755,31.6 ccw(c18.755,32.795) MCU.C.22.2 ; MCU.U.5.45@9.749,32.801 ccw(c9.775,33.2) MCU.U.5.45@9.775,32.8 ; MCU.U.5.45@9.749,32.801 ccw(c9.775,33.2) MCU.U.5.45@9.775,32.8
  Bottom Layer w0.4: v1(11.3,31.8) 18.159,31.8 ccw(c18.159,32.141) v1(18.4,31.9)
3V3: MCU.C.1.2 MCU.C.2.2 MCU.C.3.2 MCU.C.4.2 MCU.C.5.2 MCU.C.6.2 MCU.C.7.2 MCU.C.8.2 MCU.R.2.1 MCU.U.1.8 MCU.U.5.1 MCU.U.5.10 MCU.U.5.22 MCU.U.5.26 MCU.U.5.33 MCU.U.5.42 MCU.U.5.43 MCU.U.5.44 MCU.U.5.48 MCU.U.5.49 MOS.C.11.2 MOS.C.16.2 MOS.D.2.A MOS.U.2.E3 REG.C.13.2 REG.C.14.2 REG.U.3.5 | length 52.4
  Top Layer w0.2: v1(7.9,31.5) ccw(c8.624,32.224) 8.624,31.2 MCU.U.5.49 ; v1@8.2,31.6 MCU.U.5.48 ; v1(10.1,27.5) 10.819,27.5 ccw(c10.819,27.756) MCU.U.5.1 ; MCU.U.5.43 cw(c10.175,34.632) 9.445,33.902 MCU.C.2.2 ccw(c10.022,34.648) 9.087,33.713 9.4,33.4 ccw(c9.883,33.883) 9.883,33.2 MCU.U.5.44 ccw(c10.115,33.26) 10.2,33.26 v1(10.2,34.4) cw(c10.26,34.34) 10.26,34.425 MCU.U.5.42 11,34.872 ccw(c9.122,34.872) MCU.C.8.2 ; MCU.C.4.2@14.6,25.5 MCU.U.5.10 ; MCU.U.5.33 14.6,35.076 cw(c15.624,35.076) v1@14.9,35.8 ; MCU.U.5.22 19.86,31.2 ccw(c19.86,32.784) 20.984,31.668 MCU.C.5.2 ; MCU.U.5.26 17.917,32.8 ccw(c17.917,33.483) v1(18.4,33)
  Top Layer w0.6: MCU.C.4.2@14.9,25.556 v1@14.9,26.5
  Top Layer w0.65: MCU.C.1.2 cw(c-0.159,29.691) -0.005,29.691 MCU.U.1.8
  Top Layer w0.7: MCU.C.7.2 7.865,31.585 cw(c7.779,31.5) v1(7.9,31.5) ; MCU.C.2.2 ccw(c9.298,35.245) 9.298,34.4 v1(10.2,34.4) ; MCU.C.3.2@8.99,27.04 cw(c10.1,25.931) v1(10.1,27.5) ; v1(14.6,35.9) MCU.C.6.2 ; MCU.C.5.2 ccw(c21.1,32.071) MCU.C.5.2@21.185,31.985 ; MCU.C.5.2@21.185,31.985 v1(22,32.8)
  Top Layer w0.8: MOS.D.2.A MOS.D.2.A@13.108,19.558 ; MOS.C.11.2@15.7,20.302 14.905,20.302 ccw(c14.905,17.762) MOS.D.2.A@13.108,19.558 ; MOS.C.16.2 ccw(c16.4,19.598) 14.774,21.224 v1(13.852,20.302) MOS.D.2.A@13.108,19.558
  Top Layer w1: v1(-1,31.7) REG.C.13.2@-0.102,31.7 ; v1(-1,33.3) -0.102,33.3 ; v1(-1,34.5) -0.585,34.5 cw(c-0.585,33.817) REG.C.14.2 ; v1(-0.8,18.7) -0.316,18.216 cw(c-0.832,17.7) MCU.R.2.1 ; v1(-0.5,37.1) cw(c-1.46,36.14) -0.102,36.14 -0.102,35.5 ; MCU.C.1.2 cw(c0.077,29.926) -0.102,29.926 REG.C.13.2@-0.102,31.7 ; v1(0.6,35.5) -0.102,35.5 ; REG.C.13.2@-0.102,31.7 REG.C.13.2 -0.102,33.3 ; -0.102,33.3 REG.C.14.2 ; REG.C.14.2 -0.102,35.5
  other v1: 15,21.4 14.85,26.5 -0.1,30.9 18.6,30.9
  other v3: 11.475,21.125
GND: LBS.SW.1.B LED.C.20.1 LED.D.1.3 MCH.SP.2.1 MCH.SP.3.1 MCH.SP.4.1 MCH.SP.5.1 MCH.SP.6.1 MCH.SP.7.1 MCH.SP.9.1 MCH.SP.11.1 MCH.SP.12.1 MCH.SP.13.1 MCH.SP.17.1 MCU.C.1.1 MCU.C.2.1 MCU.C.3.1 MCU.C.4.1 MCU.C.5.1 MCU.C.6.1 MCU.C.7.1 MCU.C.8.1 MCU.C.21.1 MCU.C.22.1 MCU.C.24.1 MCU.J.1.1 MCU.U.1.4 MCU.U.5.3 MCU.U.5.5 MCU.U.5.6 MCU.U.5.8 MCU.U.5.11 MCU.U.5.13 MCU.U.5.14 MCU.U.5.16 MCU.U.5.17 MCU.U.5.18 MCU.U.5.19 MCU.U.5.27 MCU.U.5.29 MCU.U.5.30 MCU.U.5.31 MCU.U.5.32 MCU.U.5.34 MCU.U.5.35 MCU.U.5.36 MCU.U.5.37 MCU.U.5.38 MCU.U.5.39 MCU.U.5.40 MCU.U.5.41 MCU.U.5.57 MCU.Y.1.2 MCU.Y.1.4 MOS.C.10.1 MOS.C.11.1 MOS.C.16.1 MOS.U.2.C1 REG.C.12.1 REG.C.13.1 REG.C.14.1 REG.U.3.2 USB.J.3.1 USB.J.3.12 USB.J.3.SHELL USB.Ra.1.1 USB.Ra.1.2 USB.Ra.1.3 USB.Ra.1.4 USB.Z.1.2
  other v1: 9.9,-3.4 12.1,-3.4 6.6,-1.9 8.4,-1.9 13.6,-1.9 15.5,-1.9 19.9,3.7 2.5,3.9 13.3,6 11.9,8.5 14.4,8.6 2.6,10.6 20.1,11.1 10.8,11.4 16.4,13.3 10.3,13.8 18.9,16.5 11,16.6 15.4,17.3 14.5,19 4.7,19.1 11,19.9 7.2,20.1 20,20.9 4.8,21.1 15.1,22.9 -0.4,23.4 5.2,23.5 10.4,24.1 18.8,25.3 20.6,25.3 22.3,25.3 -0.4,25.6 10.1,26.2 6.2,26.5 16.8,26.6 22.8,26.8 18.1,26.9 22.8,28.2 5.4,28.8 11.5,28.9 15.7,28.9 22.8,29.6 2.4,30.9 22.5,31.3 5.8,32.1 4,33.1 15.7,33.1 11.5,33.2 0.9,33.3 20.3,34.6 5.2,35.2 7.8,35.8 13.5,36.2 1.2,36.6 16.5,36.6 22.5,37.3 1.2,37.6 12.555,39.299 14.3,39.3 1.5,39.9 5.7,39.9 17.5,42
  other v2: 5,-4.5 17,-4.5 -0.5,-2.5 22.5,-2.5 -0.5,7 5,7 17.5,7 22.5,7 -0.5,14 22.5,15.5 22.5,23
  other v3: 10.45,21.9
LEDData: LED.R.16.2 MCU.U.5.15 | length 18.8
  Top Layer w0.2: LED.R.16.2 cw(c13.182,12.8) 11.991,13.991 12.305,14.305 cw(c13.5,13.11) 13.5,14.8 ccw(c13.5,17.214) 15.207,15.507 16.382,16.682 16.812,17.112 ccw(c15.016,18.908) 17.556,18.908 17.556,22.319 cw(c18.1,22.4) 17.55,22.4 cw(c18.1,22.4) 17.556,22.481 17.556,25.73 ccw(c12.473,25.73) 17.169,27.676 cw(c18.918,28.4) MCU.U.5.15
NetLBS.SW.1_A: LBS.SW.1.A MCU.U.5.28 | length 43.7
  Top Layer w0.2: MCU.U.5.28 17.176,33.6 ccw(c17.176,34.624) v1(17.9,33.9)
  Top Layer w0.4: LBS.SW.1.A@14.4,0.6 14.656,0.856 ccw(c12.86,2.652) 15.4,2.652 15.4,13.21 cw(c19.721,13.21) 16.666,16.266 16.9,16.5 ccw(c14.244,19.156) 18,19.156 v1@18,22.4
  Top Layer w0.8: LBS.SW.1.A@7.6,0.6 LBS.SW.1.A@14.4,0.6
  Bottom Layer w0.4: v1(17.9,33.9) 18.134,33.9 cw(c18.134,32.534) 19.1,33.5 cw(c17.651,32.051) 19.7,32.051 19.7,25.552 cw(c17.16,25.552) 18.956,23.756 18.454,23.254 ccw(c19.307,22.4) v1(18.1,22.4)
NetLED.D.1_2: LED.D.1.2 LED.R.9.2 | length 2.6
  Top Layer w0.8: LED.R.9.2 8.398,7.224 cw(c8.646,7.224) LED.D.1.2
NetLED.D.1_4: LED.D.1.4 LED.R.16.1 | length 2.3
  Top Layer w1: LED.D.1.4 13.502,10.832 LED.R.16.1
NetMCU.J.1_2: MCU.J.1.2 MCU.R.1.1 | length 3
  Top Layer w0.8: MCU.J.1.2 4.5,15.745 cw(c7.04,15.745) 5.244,17.542 MCU.R.1.1
NetMCU.R.1_2: MCU.R.1.2 MCU.R.2.2 MCU.U.1.1 MCU.U.5.56 | length 20.2
  Top Layer w0.2: v1(4,22.9) cw(c4.241,23.141) 3.9,23.141 cw(c8.918,23.141) 5.37,26.69 5.659,26.979 cw(c9.09,23.547) 9.09,28.4 MCU.U.5.56
  Top Layer w0.4: v1(0,21.8) -0.005,21.795 MCU.U.1.1 ccw(c2.035,20.45) 0.593,19.007 1.9,17.7 MCU.R.2.2 MCU.R.1.2
  Bottom Layer w0.4: v1(0,21.8) 0.564,22.364 cw(c2.1,20.827) 2.1,23 3.759,23 cw(c3.759,22.659) v1(4,22.9)
NetMCU.R.3_1: MCU.R.3.1 MCU.U.5.9 | length 1.6
  Top Layer w0.2: MCU.R.3.1@13.752,26.152 13.9,26.3 ccw(c13.176,27.024) 14.2,27.024 MCU.U.5.9
NetMCU.R.3_2: MCU.R.3.2 MCU.U.5.2 MOS.U.2.C3 | length 6.6
  Top Layer w0.2: MCU.R.3.2 11.4,25.802 MCU.U.5.2
  Top Layer w0.25: MCU.R.3.2 11.398,24.555 ccw(c13.938,24.555) 12.142,22.758 v6(12.5,22.4)
  Bottom Layer w0.22: v3(11.55,21.9) 11.732,22.082 ; 11.732,22.082 cw(c12.5,21.314) v6(12.5,22.4)
NetMCU.R.11_1: MCU.R.11.1 MCU.U.5.21 | length 2.9
  Top Layer w0.2: MCU.U.5.21 17.517,30.8 cw(c17.517,30.117) 18,30.6 ccw(c19.207,31.807) 19.207,30.1 MCU.R.11.1
NetMCU.R.11_2: MCU.R.11.2 MCU.Y.1.3 | length 1.9
  Top Layer w0.3: MCU.Y.1.3 21.5,29.611 cw(c22.191,29.611) MCU.R.11.2
NetMCU.U.1_2: MCU.U.1.2 MCU.U.5.55 | length 14.1
  Top Layer w0.2: MCU.U.1.2 1.265,21.715 cw(c1.385,21.715) v1(1.3,21.8) ; v1(3.2,22.3) ccw(c2.959,22.541) 3.3,22.541 cw(c9.477,22.541) 5.109,26.909 5.493,27.293 cw(c9.131,23.654) 9.131,28.8 MCU.U.5.55
  Bottom Layer w0.4: v1(1.3,21.8) cw(c2.507,20.593) 2.507,22.3 v1(3.2,22.3)
NetMCU.U.1_3: MCU.U.1.3 MCU.U.5.54 | length 13.3
  Top Layer w0.2: MCU.U.1.3 ccw(c2.378,20.607) 2.6,20.607 2.6,21.844 cw(c9.977,21.844) 4.761,27.061 5.293,27.593 cw(c9.173,23.713) 9.173,29.2 MCU.U.5.54
NetMCU.U.1_5: MCU.U.1.5 MCU.U.5.53 | length 7.4
  Top Layer w0.2: MCU.U.1.5 3.805,27.946 cw(c5.154,27.946) 4.2,28.9 cw(c5.89,27.21) 5.89,29.6 MCU.U.5.53
NetMCU.U.1_6: MCU.U.1.6 MCU.U.5.52 | length 8.7
  Top Layer w0.2: MCU.U.1.6 cw(c3.947,27.75) 2.949,28.749 3.456,29.256 cw(c5.252,27.46) 5.252,30 MCU.U.5.52
NetMCU.U.1_7: MCU.U.1.7 MCU.U.5.51 | length 10
  Top Layer w0.2: MCU.U.1.7 cw(c1.784,27.75) 1.417,28.117 2.956,29.656 cw(c4.752,27.86) 4.752,30.4 MCU.U.5.51
NetMCU.U.5_4: MCU.U.5.4 MOS.U.2.D2 | length 8.4
  Top Layer w0.2: MCU.U.5.4 12.2,24.166 ccw(c13.566,24.166) 12.6,23.2 12.931,22.869 cw(c12.461,22.4) 13.125,22.4 cw(c11.978,22.4) 12.789,21.589 v7(12.5,21.3)
  Bottom Layer w0.2: v3(11,21.6) ccw(c11.181,21.781) 11.181,21.525 11.957,21.525 cw(c11.957,20.757) v7(12.5,21.3)
NetMCU.U.5_7: MCU.U.5.7 MOS.U.2.A3 | length 6.3
  Top Layer w0.2: v4(13.2,24.2) 12.924,24.476 cw(c13.707,25.259) 12.6,25.259 12.6,26.217 cw(c13.283,26.217) 12.8,26.7 12.829,26.729 cw(c13,26.559) 13,26.8 13.059,26.8 ccw(c13.059,27.141) 13.3,26.9 ccw(c13.059,27.141) 13.4,27.141 MCU.U.5.7
  Bottom Layer w0.26: v3(11.475,22.675) 12.859,24.059 cw(c13.2,23.717) v4(13.2,24.2)
NetMCU.U.5_12: MCU.U.5.12 MOS.U.2.B2 | length 9.7
  Top Layer w0.2: v4(14.7,23.975) 15.412,24.687 ccw(c14.836,25.262) 15.65,25.262 15.65,26.438 ccw(c15.138,26.438) 15.5,26.8 cw(c15.741,27.041) 15.4,27.041 MCU.U.5.12
  Bottom Layer w0.2: v3(11,22.2) 11,22.771 cw(c11.854,22.771) 11.25,23.375
  Bottom Layer w0.26: 11.25,23.375 12.585,24.71 cw(c13.104,24.19) 13.104,24.925 13.325,24.925 cw(c13.325,23.899) 14.051,24.624 v4(14.7,23.975)
NetMCU.U.5_20: MCU.U.5.20 MCU.Y.1.1 | length 5.1
  Top Layer w0.2: MCU.U.5.20 17.417,30.4 cw(c17.417,29.717) 17.9,30.2 cw(c17.176,29.476) 18.2,29.476 18.2,28.124 ccw(c19.224,28.124) 18.5,27.4 MCU.Y.1.1@19.229,26.671 ; MCU.Y.1.1@19.229,26.671 cw(c19.059,26.5) MCU.Y.1.1
NetMCU.U.5_46: MCU.U.5.46 USB.R.6.2 | length 17.3
  Top Layer w0.2: v1(8.005,33.098) 8,33.1 8.034,33.1 cw(c8.034,31.734) 9,32.7 ccw(c9.724,33.424) 9.724,32.4 MCU.U.5.46 ; USB.R.6.2@20.792,36.508 ccw(c21.3,37.016) USB.R.6.2
  Top Layer w0.4: v1(20.2,37.1) USB.R.6.2@20.792,36.508
  Bottom Layer w0.26: v1(8.005,33.098) 9.046,33.098 ccw(c9.046,35.638) 10.842,33.842 11.356,34.356 cw(c13.152,32.56) 13.152,35.1 17.148,35.1 ccw(c17.148,37.64) 18.944,35.844 v1(20.2,37.1)
NetMCU.U.5_47: MCU.U.5.47 USB.R.7.2 | length 14.5
  Top Layer w0.2: v1(8.489,32.287) 8.5,32.3 ccw(c9.224,33.024) 9.224,32 MCU.U.5.47
  Top Layer w0.4: v1(19.2,35) 19.2,35.856 cw(c19.541,35.856) USB.R.7.2
  Bottom Layer w0.26: v1(8.489,32.287) cw(c9.004,31.772) 9.004,32.5 11.476,32.5 ccw(c11.476,33.524) 12.2,32.8 13.356,33.956 cw(c15.152,32.16) 15.152,34.7 18.476,34.7 ccw(c18.476,35.724) v1(19.2,35)
NetMOS.C.10_2: MOS.C.10.2 MOS.U.2.A1 | length 4.9
  Top Layer w0.5: MOS.C.10.2 ccw(c6.389,22.591) 6.389,21.9 v1(7.2,21.9)
  Bottom Layer w0.25: v1(7.2,21.9) 8.834,21.9 ccw(c8.834,24.111) 10.397,22.547 v3(10.525,22.675)
NetMOS.D.2_C: MOS.D.2.C MOS.U.2.E1 | length 2.5
  Bottom Layer w0.25: v1(9.45,19) cw(c11.985,19) 10.192,20.792 v3(10.525,21.125)
NetUSB.FB.1_1: USB.FB.1.1 USB.J.3.2 USB.J.3.11 USB.Z.1.4 USB.Z.1.5 | length 15.1
  Top Layer w0.5: USB.J.3.11 8.65,40.423 ccw(c8.821,40.423) USB.FB.1.1 ; v1(13,43.3) cw(c12.155,42.455) 13.35,42.455 USB.J.3.2
  Top Layer w0.55: USB.FB.1.1@8.65,40.423 ccw(c9.551,40.423) 8.658,40.3 ccw(c9.551,40.423) 8.914,39.786 9.2,39.5 ccw(c9.683,39.983) 9.683,39.3 USB.Z.1.5 ; USB.FB.1.1 ccw(c8.827,40.429) 8.702,40.3 ccw(c8.827,40.429) 8.827,40.25 USB.Z.1.4
  Top Layer w0.7: v1(7.7,40.3) 8.658,40.3 8.702,40.3 8.706,40.3 cw(c8.706,40.129) USB.FB.1.1@8.827,40.25
  Bottom Layer w0.5: v1(7.7,40.3) 8.948,40.3 ccw(c8.948,42.84) 10.744,41.044 v1(13,43.3)
NetUSB.FB.2_1: USB.FB.2.1 USB.J.3.5 USB.J.3.8 USB.Z.1.3 | length 7.7
  Top Layer w0.27: USB.J.3.8 10.25,42.238 cw(c10.762,42.238) 10.4,42.6 cw(c10.641,42.359) 10.641,42.7 11.359,42.7 cw(c11.359,42.359) 11.6,42.6 cw(c11.238,42.238) 11.75,42.238 USB.J.3.5 11.75,41.362 ccw(c12.262,41.362) 11.9,41 12.084,40.816 ccw(c13.45,42.181) USB.Z.1.3
  Top Layer w0.4: USB.Z.1.3 14.653,40.25 cw(c14.653,39.055) USB.FB.2.1
NetUSB.FB.2_2: USB.FB.2.2 USB.R.6.1 | length 4.3
  Top Layer w0.4: USB.FB.2.2 17.658,39.744 ccw(c19.455,41.54) 19.455,39 19.9,39 cw(c19.9,37.304) 21.099,38.503 USB.R.6.1
NetUSB.FB.3_1: USB.FB.3.1 USB.J.3.6 USB.J.3.7 USB.Z.1.1 | length 7.7
  Top Layer w0.27: USB.J.3.7 USB.J.3.6 11.25,41.062 ccw(c11.762,41.062) 11.4,40.7 cw(c10.917,40.217) 11.6,40.217 11.6,39.183 ccw(c12.283,39.183) 11.8,38.7 ccw(c12.645,39.545) 12.645,38.35 USB.Z.1.1
  Top Layer w0.4: USB.Z.1.1 14.411,38.35 cw(c14.411,36.814) USB.FB.3.1
NetUSB.FB.3_2: USB.FB.3.2 USB.R.7.1 | length 1.9
  Top Layer w0.4: USB.FB.3.2 cw(c17.991,37.411) 17.991,38.102 USB.R.7.1
NetUSB.J.3_3: USB.J.3.3 USB.Ra.1.5 USB.Ra.1.6 | length 11.1
  Top Layer w0.26: USB.Ra.1.6 USB.Ra.1.5 5.379,41.75 ccw(c5.379,41.921) v1(5.5,41.8) ; v1(11,43.5) cw(c11,41.569) 12.366,42.934 12.6,42.7 cw(c12.238,42.338) 12.75,42.338 USB.J.3.3
  Bottom Layer w0.4: v1(5.5,41.8) 5.5,42.193 cw(c7.066,42.193) 5.959,43.3 cw(c6.683,42.576) 6.683,43.6 10.759,43.6 cw(c10.759,43.259) v1(11,43.5)
NetUSB.J.3_9: USB.J.3.9 USB.Ra.1.7 USB.Ra.1.8 | length 9.2
  Top Layer w0.27: USB.Ra.1.8 USB.Ra.1.7 3.2,42.017 cw(c3.883,42.017) 3.4,42.5 cw(c3.883,42.017) 3.883,42.7 4.793,42.7 ccw(c4.793,44.407) 6,43.2 cw(c6.724,42.476) 6.724,43.5 8,43.5 cw(c8,41.81) 9.195,43.005 9.6,42.6 cw(c9.238,42.238) 9.75,42.238 USB.J.3.9
V_USB: LED.C.20.2 LED.D.1.1 REG.C.12.2 REG.U.3.1 REG.U.3.3 USB.FB.1.2 | length 42.7
  Top Layer w0.6: REG.U.3.1 REG.C.12.2@3.349,36.15 ; REG.U.3.3 5.356,38.05 5.358,38.05 ccw(c5.358,38.414) 5.615,38.157
  Top Layer w0.8: REG.C.12.2@3.9,36.202 cw(c5.343,36.202) 4.323,37.223 4.654,37.554 cw(c6.45,35.758) 5.356,38.05 cw(c6.45,35.758) 6.45,38.298 USB.FB.1.2 ; v5(7,11.8) LED.D.1.1@8.009,10.791 ; LED.D.1.1@8.009,10.791 ccw(c8.47,11.252) LED.D.1.1
  Top Layer w1: LED.C.20.2@8.198,12.8 8.198,10.872 LED.D.1.1
  Bottom Layer w0.8: v5(4.2,37.6) 3.744,37.144 ccw(c5.54,35.348) 3,35.348 3,32.6 ccw(c4.207,32.6) 3.353,31.747 3.6,31.5 cw(c2.151,30.051) 4.2,30.051 4.2,27.09 ccw(c6.59,27.09) 4.9,25.4 5.456,24.844 cw(c3.66,23.048) 6.2,23.048 6.2,13.652 ; 6.2,15 6.2,13.652 ; v5(7,11.8) 6.944,11.856 cw(c8.74,13.652) 6.2,13.652
pads on no net: LED.R.9.1 MCH.FID.1.1 MCH.FID.2.1 MCU.U.5.24 MCU.U.5.25 MOS.U.2. REG.U.3.4 USB.J.3. USB.J.3.4 USB.J.3.10 USB.Z.1.6

## Polygon pours and split planes (outlines as drawn)
GND on Plane 2 "GND_L03_P003" (solid, remove dead copper, pour order 3): -2,48 -2,-6 24,-6 24,48
3V3 on Plane 2 "3V3_L03_P000" (solid, remove dead copper, pour order 0): -2,37 0,39 18.5,39 24,33.5 24,22.5 19,17.5 -2,17.5
GND on Top Layer "GND_L01_P001" (solid, remove dead copper, pour order 1): -2,48 -2,-6 24,-6 24,48
GND on Plane 1 "GND_L02_P002" (solid, remove dead copper, pour order 2): -2,48 -2,-6 24,-6 24,48
GND on Bottom Layer "GND_L04_P004" (solid, remove dead copper, pour order 4): -2,48 -2,-6 24,-6 24,48

## Keep-outs
Keep-Out Layer:
  region: 2.8,42.9 ccw(c2.8,44) 3.9,44 -2,44 ccw(c-1.45,43.45) -2,42.9
  region: 19.2,42.9 cw(c19.2,44) 18.1,44 24,44 cw(c23.45,43.45) 24,42.9
  region: 13.8,-4.9 cw(c13.8,-6) 14.9,-6 7.1,-6 cw(c8.2,-6) 8.2,-4.9

## Silkscreen, mask and mechanical layers (free items; w line width, h text height)
Top Overlay:
  lines w0.8: 18.1,0 18.1,4 22.1,4 22.1,0 18.1,0 ; 18.1,9 18.1,13 22.1,13 22.1,9 18.1,9
  text "BOOT / LOADER" at 1.2,13.7 h2 r270
  text "T" at 19.401,10.1 h3
  text "P" at 19.549,1.054 h3
Bottom Overlay:
  text "Licensed under the / CERN-OHL-S v2 / Copyright Ploopy  / 2025" at -1,26.8 h2 r270
  text "R2.003" at -1,19 h3 r270
Board Outline:
  the board outline again, w0.2

## Text inside footprints (layer, text, board x,y; h text height)
MCH.LOGO.2: Top Overlay "X" at 0.799,0.2 h1.4
MOS.U.2: Top Overlay "Toward Ball" at 13.514,24.199 h1.4 r270